# EAGLE board main (EAGLE 6.5.0)
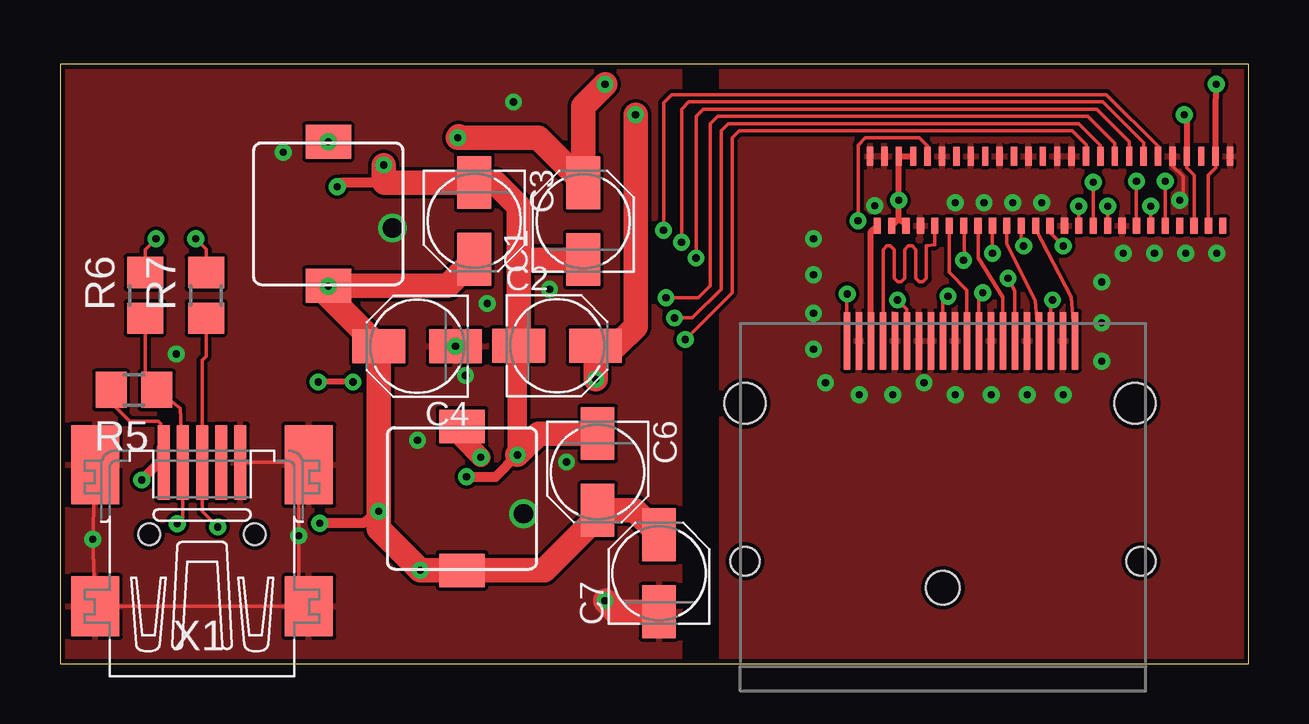
[diagram p0: board, top side]
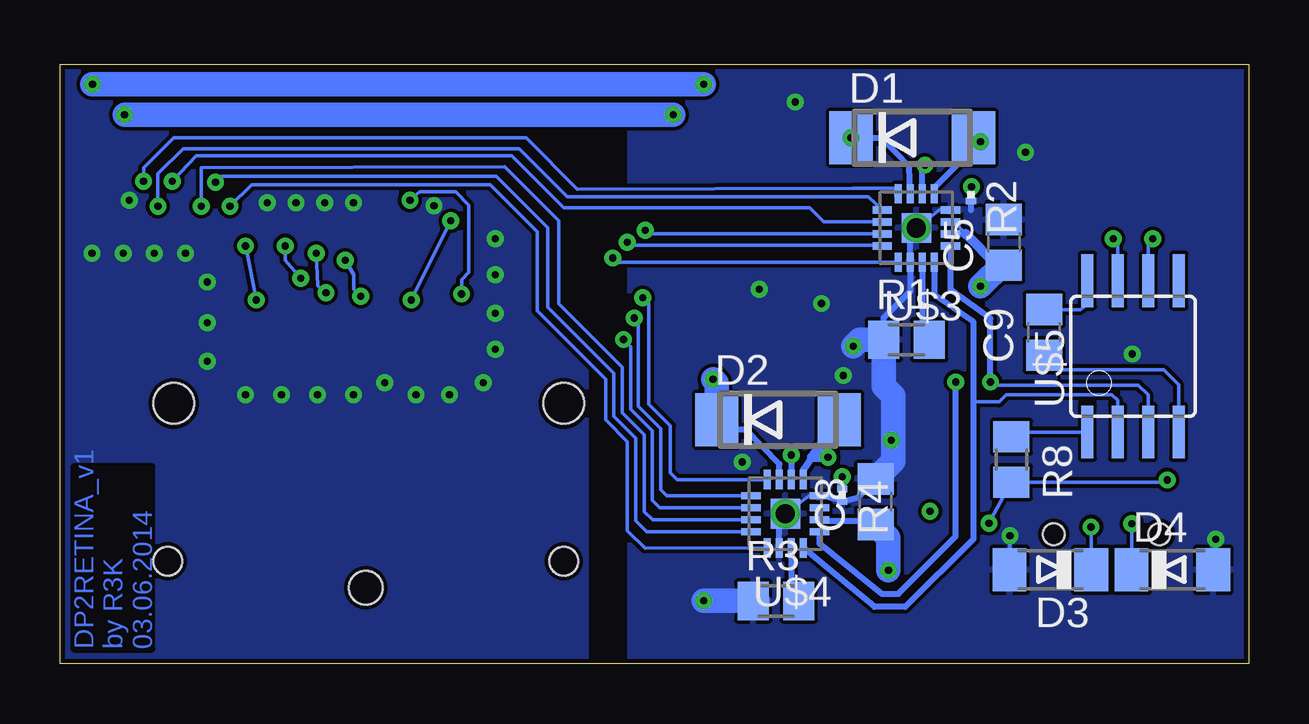
[diagram p1: board, bottom side, seen from below]

Size 49.53 x 24.97 mm. Coordinates in mm from the lower left corner, seen from the top.
Outline: 0,0 49.53,0 49.53,24.97 0,24.97 0,0
Copper layers (1*16): Top 0.035mm / dielectric 1.5mm / Bottom 0.035mm
Design rules "platinensammler_02": minimum track width 0.15mm, minimum drill 0.3mm, track to track 0.15mm, track to pad 0.15mm, pad to pad 0.15mm, via to via 0.15mm, smd to smd 0mil, copper to edge 0.2mm, drill to drill 0.2mm, minimum pad ring 0.2mm, minimum via ring 0.2mm, stop-mask expansion 4mil, vias tented up to drill 0.8mm, thermal gap 0.15mm

## Footprints (pad centres in the part's own frame; a part is rotated, then mirrored left to right if it is on the bottom)
PANASONIC_B = smd 2.2 x 1.4: + 1.6,0; - -1.6,0
C0805 = smd 1.3 x 1.5: 1 -0.95,0; 2 0.95,0
DO214AA = smd 1.8 x 2.2: A 2.55,0; C -2.55,0
MINIMELF = smd 1.4 x 1.8: A 1.7,0; C -1.7,0
PIS24XX = smd 1.4 x 1.9: 1 -3,0; 2 3,0
M0805 = smd 1.3 x 1.6: 1 -0.95,0; 2 0.95,0
R0201 = smd 0.28 x 0.43: 1 -0.255,0; 2 0.255,0
R0805 = smd 1.3 x 1.5: 1 -0.95,0; 2 0.95,0
MOLEX502250-5191 = smd 0.26 x 0.8: P1 13.2,-0.2; P3 12.6,-0.2; P5 12,-0.2; P7 11.4,-0.2; P9 10.8,-0.2; P11 10.2,-0.2; P13 9.6,-0.2; P15 9,-0.2; P17 8.4,-0.2; P19 7.8,-0.2; P21 7.2,-0.2; P23 6.6,-0.2; P25 6,-0.2; P27 5.4,-0.2; P29 4.8,-0.2; P31 4.2,-0.2; P33 3.6,-0.2; P35 3,-0.2; P37 2.4,-0.2; P39 1.8,-0.2; P41 1.2,-0.2; P43 0.6,-0.2; P45 0,-0.2; P47 -0.6,-0.2; P49 -1.2,-0.2; P51 -1.8,-0.2 | smd 0.3 x 0.65: P2 12.9,2.7; P4 12.3,2.7; P6 11.7,2.7; P8 11.1,2.7; P10 10.5,2.7; P12 9.9,2.7; P14 9.3,2.7; P16 8.7,2.7; P18 8.1,2.7; P20 7.5,2.7; P22 6.9,2.7; P24 6.3,2.7; P26 5.7,2.7; P28 5.1,2.7; P30 4.5,2.7; P32 3.9,2.7; P34 3.3,2.7; P36 2.7,2.7; P38 2.1,2.7; P40 1.5,2.7; P42 0.9,2.7; P44 0.3,2.7; P46 -0.3,2.7; P48 -0.9,2.7; P50 -1.5,2.7
DP1R020JQ1 = smd 0.28 x 2.4: 1 5.5,10.28; 2 5,10.28; 3 4.5,10.28; 4 4,10.28; 5 3.5,10.28; 6 3,10.28; 7 2.5,10.28; 8 2,10.28; 9 1.5,10.28; 10 1,10.28; 11 0.5,10.28; 12 0,10.28; 13 -0.5,10.28; 14 -1,10.28; 15 -1.5,10.28; 16 -2,10.28; 17 -2.5,10.28; 18 -3,10.28; 19 -3.5,10.28; 20 -4,10.28 | hole 1.4: 0,0 | hole 1.2: -8.25,1.1; 8.25,1.1 | hole 1.7: -8.25,7.68; 8,7.68
QFN16-4X4 = smd 0.8 x 0.3: 1 -1.425,0.75; 2 -1.425,0.25; 3 -1.425,-0.25; 4 -1.425,-0.75; 9 1.425,-0.75; 10 1.425,-0.25; 11 1.425,0.25; 12 1.425,0.75 | smd 0.3 x 0.8: 5 -0.75,-1.425; 6 -0.25,-1.425; 7 0.25,-1.425; 8 0.75,-1.425; 13 0.75,1.425; 14 0.25,1.425; 15 -0.25,1.425; 16 -0.75,1.425 | smd 1.23 x 1.23: EXP 0,0
SOIC8 = smd 0.5 x 2.2: 1 -1.905,-3.154; 2 -0.645,-3.154; 3 0.625,-3.154; 4 1.895,-3.154; 5 1.905,3.154; 6 0.635,3.154; 7 -0.635,3.154; 8 -1.905,3.154
32005-201 = smd 3.1 x 0.5: 1 3,1.6; 2 3,0.8; 3 3,0; 4 3,-0.8; 5 3,-1.6 | smd 2.5 x 2: M1 -3,-4.45; M2 -3,4.45 | smd 3.3 x 2: M3 2.9,4.45; M4 2.9,-4.45 | hole 0.9: 0,2.2; 0,-2.2

## Placement (x,y rotation side)
C1  [PANASONIC_B]  21.8,18.43 90 top
C2  [PANASONIC_B]  20.71,13.24 0 top
C3  [PANASONIC_B]  17.26,18.44 270 top
C4  [PANASONIC_B]  14.88,13.22 180 top
C5  [C0805]  10.2,17.55 90 bottom
C6  [PANASONIC_B]  22.4,7.98 270 top
C7  [PANASONIC_B]  24.96,3.76 90 top
C8  [C0805]  15.55,6.74 90 bottom
C9  [C0805]  8.53,13.8 90 bottom
D1  [DO214AA]  14.02,21.91 0 bottom
D2  [DO214AA]  19.61,10.16 0 bottom
D3  [MINIMELF]  8.26,3.91 180 bottom
D4  [MINIMELF]  3.18,3.91 0 bottom
L1  L-EUPIS24XX  [PIS24XX]  11.18,18.74 270 top
L2  L-EUPIS24XX  [PIS24XX]  16.75,6.88 270 top
R1  [M0805]  14.26,13.49 0 bottom
R2  0  [R0201]  11.57,19.53 270 bottom
R3  [M0805]  19.7,2.6 0 bottom
R4  0  [R0201]  16.94,7.02 270 bottom
R5  [R0805]  3.08,11.4 180 top
R6  [R0805]  3.55,15.34 90 top
R7  [R0805]  6.09,15.34 90 top
R8  [R0805]  9.89,8.5 270 bottom
U$1  IPAD3-CONN  [MOLEX502250-5191]  46.95,20.94 180 top
U$2  DP1R020JQ1SINK  [DP1R020JQ1]  36.79,3.16 0 top
U$3  MAX17129  [QFN16-4X4]  13.85,18.15 180 bottom
U$4  MAX17129  [QFN16-4X4]  19.31,6.24 180 bottom
U$5  ATTINY 85-20SU  [SOIC8]  4.82,12.8 0 bottom
X1  USB  [32005-201]  5.92,5.38 90 top

## Library data of the parts
C1-C9 R1-R8 = rcl
D1-D4 = diode
L1 L2 = Inductor-Fastron
U$1 = con-ipad3
U$2 = DP1R020JQ1
U$3 U$4 = maxim
U$5 = avr-7
X1 = con-cypressindustries; OC_FARNELL: unknown; OC_NEWARK: unknown

## Nets
+3V3: U$1.P4 U$1.P5 U$1.P6 U$1.P7 U$2.20
+5V: C3.+ C4.+ C5.1 C6.+ C7.+ C8.1 L1.2 L2.2 R5.2 R8.2 U$3.2 U$3.3 U$4.2 U$4.3 X1.1
AGND: C1.- C2.- C3.- C6.- R2.1 R4.1 U$3.6 U$4.6
AUX_N: U$1.P10 U$2.17
AUX_P: U$1.P9 U$2.15
ENABLE: U$3.16 U$4.16 U$5.2
GND: C4.- C5.2 C7.- C8.2 D3.A D4.A R1.1 R2.2 R3.1 R4.2 U$3.4 U$3.14 U$3.EXP U$4.4 U$4.14 U$4.EXP X1.5 X1.M1 X1.M2 X1.M3 X1.M4
HPD: U$1.P2 U$2.18
LANE0_N: U$1.P12 U$2.10
LANE0_P: U$1.P14 U$2.12
LANE1_N: U$1.P16 U$2.7
LANE1_P: U$1.P18 U$2.9
LANE2_N: U$1.P20 U$2.4
LANE2_P: U$1.P22 U$2.6
LANE3_N: U$1.P24 U$2.1
LANE3_P: U$1.P26 U$2.3
LED_N_A_1: U$1.P42 U$3.8
LED_N_A_2: U$1.P41 U$3.11
LED_N_A_3: U$1.P40 U$3.9
LED_N_A_4: U$1.P39 U$3.12
LED_N_A_5: U$1.P38 U$3.10
LED_N_A_6: U$1.P37 U$3.13
LED_N_B_1: U$1.P35 U$4.8
LED_N_B_2: U$1.P34 U$4.11
LED_N_B_3: U$1.P33 U$4.9
LED_N_B_4: U$1.P32 U$4.12
LED_N_B_5: U$1.P31 U$4.10
LED_N_B_6: U$1.P30 U$4.13
LED_P_1: C1.+ D1.C U$1.P48 U$1.P49 U$3.7
LED_P_2: C2.+ D2.C U$1.P45 U$1.P46 U$4.7
N$1: R1.2 U$3.15
N$2: R3.2 U$4.15
N$3: D1.A L1.1 U$3.5
N$4: D2.A L2.1 U$4.5
N$7: C9.2 U$5.8
N$8: C9.1 U$5.4
N$9: R6.2 U$5.6
N$10: R7.2 U$5.7
N$11: D3.C R7.1 X1.3
N$12: D4.C R5.1 R6.1 X1.2
N$13: R8.1 U$5.1
PANELGND: U$1.P1 U$1.P3 U$1.P8 U$1.P11 U$1.P15 U$1.P19 U$1.P23 U$1.P27 U$1.P28 U$1.P29 U$1.P36 U$1.P43 U$1.P51 U$2.2 U$2.5 U$2.8 U$2.11 U$2.13 U$2.14 U$2.16 U$2.19
PWM: U$3.1 U$4.1 U$5.3

## Tracks (layer width: path | path; a pad name or v marks a point on that pad's centre or on a via)
+3V3  (via drill 0.3)
  Top 0.15: U$2.20 32.79,15.29 v32.8,15.4
  Top 0.254: 34.95,18.54 v34.95,19.3 U$1.P5 U$1.P7 | 34.95,18.54 U$1.P4 | 35.25,18.4 U$1.P6 34.95,18.54
  Bottom 0.15: v32.8,15.4 32.8,16 32.5,16.3 32.5,19.1 33.05,19.65 34.55,19.65 v34.95,19.3
+5V  (via drill 0.3)
  Top 0.15: X1.1 4.22,8.97 4.2,8.99 4.2,10 4.1,10.1 2.9,10.1 2.13,10.87 R5.2
  Top 0.406: 4.22,8.97 4.22,8.47 v3.4,7.65 | v13.28,6.35 12.65,5.85 v10.82,5.85
  Top 1.016: C3.+ 16.16,15.74 L1.2 | v11.18,15.72 11.18,15.32 C4.+ v13.28,6.35 13.28,5.61 v15.01,3.88 L2.2 20.17,3.88 22.4,6.11 C6.+ 23.94,6.38 C7.+ | v11.18,15.72 L1.2 | L1.2 v11.17,15.73 v11.18,15.72
  Bottom 0.15: v10.82,5.85 R8.2 3.5,7.55 v3.4,7.65 | U$3.3 12.3,18.4 11.8,17.9 U$3.2
  Bottom 0.254: U$4.3 U$4.2 17.84,5.95 15.71,5.95 C8.1
  Bottom 0.406: 10.3,16.6 10.5,16.6 11.8,17.9
  Bottom 1.016: v15.01,3.88 15.01,5.25 C8.1 | C5.1 10.3,16.6 v11.18,15.72
AGND  (via drill 0.3)
  Top 0.254: C2.- 19.06,13.25
  Top 0.406: v16.94,7.78 18.15,7.78 v19.06,8.69 | 13.53,20.04 11.72,20.04 v11.55,19.87
  Top 0.813: 19.06,13.25 v19.06,8.69
  Top 1.016: v13.49,20.77 13.49,20.08 13.53,20.04 C3.- 18.11,20.05 19.11,19.05 19.11,16.58 | C2.- 19.11,16.58 | C1.- 19.36,16.83 19.11,16.58 | v19.06,8.69 19.95,9.58 C6.-
  Bottom 0.254: v19.06,8.69 U$4.6 | v11.55,19.87 R2.1 | U$3.6 13.6,20.66 v13.49,20.77
  Bottom 0.406: R4.1 v16.94,7.78
AUX_N
  Top 0.15: U$2.17 34.3,17.25 34.45,17.4 34.6,17.4 34.75,17.25 34.75,16.05 34.9,15.9 35.05,15.9 35.2,16.05 35.2,17.25 35.35,17.4 35.5,17.4 35.65,17.25 35.65,16.05 35.8,15.9 35.95,15.9 36.1,16.05 36.1,17.4 36.45,17.45 U$1.P10
AUX_P  (via drill 0.3)
  Top 0.15: U$1.P9 36.15,21.55 35.8,21.9 33.55,21.9 33.25,21.6 v33.25,18.45 | v34.9,15.15 35.29,14.76 U$2.15
  Bottom 0.15: v33.25,18.45 v34.9,15.15
ENABLE
  Bottom 0.15: U$5.2 5.46,10.96 5.7,11.2 10.1,11.2 10.4,10.9 11.38,10.9 11.48,11
  Bottom 0.254: U$3.16 13.1,15.39 11.48,14.26 11.48,11 11.47,5.18 14.32,2.36 15.59,2.36 U$4.16
GND  (via drill 0.3, 0.8)
  Top 0.15: X1.5 10.17,8.38 X1.M4 9.95,7.87 v9.95,5.33 9.95,2.7 X1.M1 X1.M2 v1.37,5.18 X1.M3
  Top 1.016: C7.- 23.16,2.16 v22.71,2.61
  Bottom 0.15: U$4.4 18.32,6.99 U$4.EXP | U$3.4 12.87,18.9 U$3.EXP | v9.95,5.33 D3.A | D4.A 1.37,4.02 v1.37,5.18
  Bottom 0.254: U$4.4 17.45,6.92 R4.2 16.27,6.93 C8.2 | U$4.14 19.56,5.99 U$4.EXP | R2.2 11.57,18.91 | U$3.EXP 14.1,18.15 U$3.14 14.1,15.51 15.22,14.39 R1.1
  Bottom 1.016: C4.- 16.21,13.49 R1.1 15.21,11.55 14.82,11.16 14.82,8.42 C8.2 | v22.71,2.61 20.45,2.61 R3.1
  other vias: 19.31,6.24 13.85,18.15 16.48,13.22 14.9,9.3 16.9,12 21.1,8.4 17.8,15 20.4,15.6 9.3,21.3 18.9,23.4 4.85,12.9
  pour Bottom: 25.8,0 -0.5,-0.1 -0.5,25.6 25.8,25.7
  pour Top: -0.5,25.6 25.8,25.6 25.8,-0.1 -0.5,-0.1
HPD
  Top 0.254: U$2.18 33.79,17.98 U$1.P2
LANE0_N
  Top 0.15: U$2.10 37.79,15.56 37.05,16.3 U$1.P12
LANE0_P  (via drill 0.3)
  Top 0.15: U$2.12 36.79,15.09 v37,15.3 | U$1.P14 37.7,16.85 v37.65,16.8
  Bottom 0.15: v37,15.3 37.3,15.6 37.3,16.2 v37.65,16.8
LANE1_N
  Top 0.15: U$2.7 39.29,15.26 38.25,16.9 U$1.P16
LANE1_P  (via drill 0.3)
  Top 0.15: U$2.9 38.29,15.39 v38.45,15.45 | U$1.P18 v38.85,17.1
  Bottom 0.15: v38.45,15.45 38.8,15.75 v38.85,17.1
LANE2_N
  Top 0.15: U$2.4 40.64,15.11 39.45,17.5 U$1.P20
LANE2_P  (via drill 0.3)
  Top 0.15: U$2.6 39.79,15.54 v39.5,16.05 | v40.15,17.4 40.05,17.5 U$1.P22
  Bottom 0.15: v39.5,16.05 40.15,16.8 v40.15,17.4
LANE3_N
  Top 0.15: U$2.1 42.14,15.26 40.65,18.1 U$1.P24
LANE3_P  (via drill 0.3)
  Top 0.15: U$1.P26 41.25,17.95 v41.8,17.4 | U$2.3 41.29,15.09 v41.35,15.15
  Bottom 0.15: v41.35,15.15 v41.8,17.4
LED_N_A_1  (via drill 0.3)
  Top 0.15: U$1.P42 v46.05,20.1
  Bottom 0.15: U$3.8 14.71,19.47 14.71,19.8 16.5,19.8 27.97,19.77 30.1,21.9 44.8,21.9 46.05,20.65 v46.05,20.1
LED_N_A_2  (via drill 0.3)
  Top 0.15: U$1.P41 45.75,21.55 43.6,23.7 25.49,23.7 25.15,23.36 v25.15,18.05
  Bottom 0.15: U$3.11 25,17.9 v25.15,18.05
LED_N_A_3  (via drill 0.3)
  Top 0.15: U$1.P40 v45.45,19.05
  Bottom 0.15: U$3.9 15.85,19.45 28.4,19.45 30.4,21.45 44.4,21.45 45.45,20.4 v45.45,19.05
LED_N_A_4  (via drill 0.3)
  Top 0.15: U$1.P39 45.15,21.7 43.45,23.4 26.2,23.4 25.9,23.1 v25.9,17.55
  Bottom 0.15: U$3.12 15.3,17.43 25.78,17.43 v25.9,17.55
LED_N_A_5  (via drill 0.3)
  Top 0.15: U$1.P38 v44.85,20.1
  Bottom 0.15: U$3.10 17.7,18.4 18.3,19 28.55,19 30.7,21.15 43.85,21.15 v44.85,20.1
LED_N_A_6  (via drill 0.3)
  Top 0.15: U$1.P37 44.55,21.75 43.2,23.1 26.8,23.1 26.5,22.8 v26.5,16.9
  Bottom 0.15: U$3.13 26.32,16.73 v26.5,16.9
LED_N_B_1  (via drill 0.3)
  Top 0.15: U$1.P35 43.95,21.67 42.82,22.8 27.4,22.8 27.1,22.5 27.1,15.75 26.59,15.24 v25.25,15.24
  Bottom 0.15: U$4.8 23.82,7.67 24.1,7.95 24.1,9.9 25,10.8 25,14.99 v25.25,15.24
LED_N_B_2  (via drill 0.3)
  Top 0.15: U$1.P34 v43.65,19.05
  Top 0.254: U$1.P34
  Bottom 0.15: U$4.11 24.84,5.99 25.18,6.33 25.19,8.96 25.19,9.54 26.1,10.45 26.1,12.35 28.75,15 28.75,18.45 31,20.7 43.65,20.65 v43.65,19.05
LED_N_B_3  (via drill 0.3)
  Top 0.15: U$1.P33 43.35,21.6 42.45,22.5 27.85,22.5 27.55,22.2 27.55,15.6 26.35,14.4 v25.6,14.4
  Bottom 0.15: U$4.9 24.24,6.99 24.49,7.24 24.49,9.78 25.43,10.72 25.43,14.25 25.45,14.25 v25.6,14.4
LED_N_B_4  (via drill 0.3)
  Top 0.15: U$1.P32 v43.05,20.05
  Bottom 0.15: U$4.12 25.08,5.49 25.54,5.95 25.54,9.39 26.45,10.3 26.45,12.1 29.2,14.85 29.2,18.15 31.35,20.3 42.8,20.3 v43.05,20.05
LED_N_B_5  (via drill 0.3)
  Top 0.15: U$1.P31 42.75,21.62 42.17,22.2 28.3,22.2 28,21.9 28,15.45 v26.05,13.5
  Bottom 0.15: U$4.10 24.55,6.49 24.85,6.8 24.85,9.7 25.75,10.6 25.75,13.2 v26.05,13.5
LED_N_B_6  (via drill 0.3)
  Top 0.15: U$1.P30 v42.45,19.05
  Bottom 0.15: U$4.13 25.16,4.8 25.89,5.54 25.89,9.24 26.8,10.15 26.8,11.85 29.65,14.7 29.65,18 31.6,19.95 41.55,19.95 v42.45,19.05
LED_P_1  (via drill 0.3)
  Top 0.15: U$1.P48 47.85,20.35 48.15,20.65 U$1.P49
  Top 0.254: U$1.P49 48.15,22.9 v48.18,24.13
  Top 1.016: 16.62,21.96 D1.C 19.92,21.91 C1.+ 21.8,23.22 v22.71,24.13
  Bottom 0.254: U$3.7 14.14,20.7 15.32,21.91 D1.C
  Bottom 1.016: v22.71,24.13 v48.18,24.13
  other vias: 16.57,21.91
LED_P_2  (via drill 0.3)
  Top 0.15: U$1.P45 46.95,20.65 47.25,20.35 U$1.P46
  Top 0.254: v46.84,22.86 46.95,22.75 U$1.P45
  Top 1.016: v22.32,11.84 C2.+ 23.18,13.24 23.98,14.04 v23.98,22.86
  Bottom 0.254: U$4.7 19.56,8.31 20.96,9.74 21.97,9.74 D2.C
  Bottom 1.016: D2.C 22.16,11.68 v22.32,11.84 | v23.98,22.86 v46.84,22.86
N$1
  Bottom 0.254: U$3.15 13.6,13.78 R1.2
N$2
  Bottom 0.254: U$4.15 19.06,2.92 R3.2
N$3  (via drill 0.3)
  Bottom 0.254: U$3.5 13.1,19.82 L1.1 11.35,21.91 D1.A
  other vias: 11.18,21.74
N$4  (via drill 0.3)
  Top 0.15: L2.1 16.75,9.38
  Top 0.813: 16.75,9.38 v17.53,8.6
  Bottom 0.15: v17.53,8.6 17.62,8.6
  Bottom 0.254: U$4.5 18.56,8.05
  Bottom 0.3: 18.56,8.05 18.2,8.6
  Bottom 0.406: D2.A 18.2,8.6 17.62,8.6
N$7
  Bottom 0.15: U$5.8 6.72,14.96 7.03,14.75 C9.2
N$8
  Bottom 0.15: U$5.4 2.92,11.61 3.55,12.23 7.91,12.23 C9.1
N$9  (via drill 0.3)
  Top 0.15: v4,17.7 3.55,17.25 R6.2
  Bottom 0.15: U$5.6 4.18,17.52 v4,17.7
N$10  (via drill 0.3)
  Top 0.15: v5.65,17.7 6.09,17.26 R7.2
  Bottom 0.15: U$5.7 5.46,17.5 v5.65,17.7
N$11  (via drill 0.3)
  Top 0.15: v6.57,5.69 5.92,6.34 X1.3 5.92,12.63 6.09,12.8 R7.1
  Bottom 0.15: v6.57,5.69 D3.C
N$12  (via drill 0.3)
  Top 0.15: v4.88,5.82 5.12,6.06 X1.2 5.02,10.64 R5.1 3.55,11.85 R6.1
  Bottom 0.15: v4.88,5.82 D4.C
N$13
  Bottom 0.15: U$5.1 9.69,9.65 R8.1
PANELGND  (via drill 0.3)
  Top 0.15: U$1.P43 46.35,20.75 46.8,20.3 46.8,19.45 v46.65,19.3
  other vias: 31.4,17.7 31.4,16.2 31.4,14.6 31.4,13.1 31.9,11.7 33.3,11.2 34.7,11.2 36,11.7 37.3,11.2 38.8,11.2 40.3,11.2 41.8,11.2 43.4,12.6 43.4,14.2 43.4,15.9 44.3,17.1 46.9,17.1 45.6,17.1 48.2,17.1 40.9,19.2 38.5,19.2 39.7,19.2 37.3,19.2 33.95,19.07
  pour Top: 27.6,25.3 51,25.3 51,-0.1 27.6,-0.1
  pour Bottom: 27.6,25.3 51,25.3 51,-0.1 27.6,-0.1
PWM  (via drill 0.3)
  Top 0.254: v12.21,11.73 v10.76,11.73
  Bottom 0.15: U$5.3 4.2,11.2 4.6,11.6 10.63,11.6 v10.76,11.73
  Bottom 0.254: v12.21,11.73 12.21,5.3 14.6,2.9 15.29,2.9 17.89,5.01 U$4.1 | v10.76,11.73 10.76,14.38 12.42,15.56 U$3.1

## Text on the board
Bottom: DP2RETINA_v1 / by R3K / 03.06.2014